# Altium PCB BH67F275&62_TEMP_EVM_V1.2.PcbDoc (part 1 of 2)
Units mil, origin at the board's own origin, x right, y up, seen from the top; angles counter-clockwise.
Board outline 4690.02 x 3082.03 mil, 2 copper layers (Top Layer, Bottom Layer); 69 components, 83 nets, 365 pads, 122 vias.
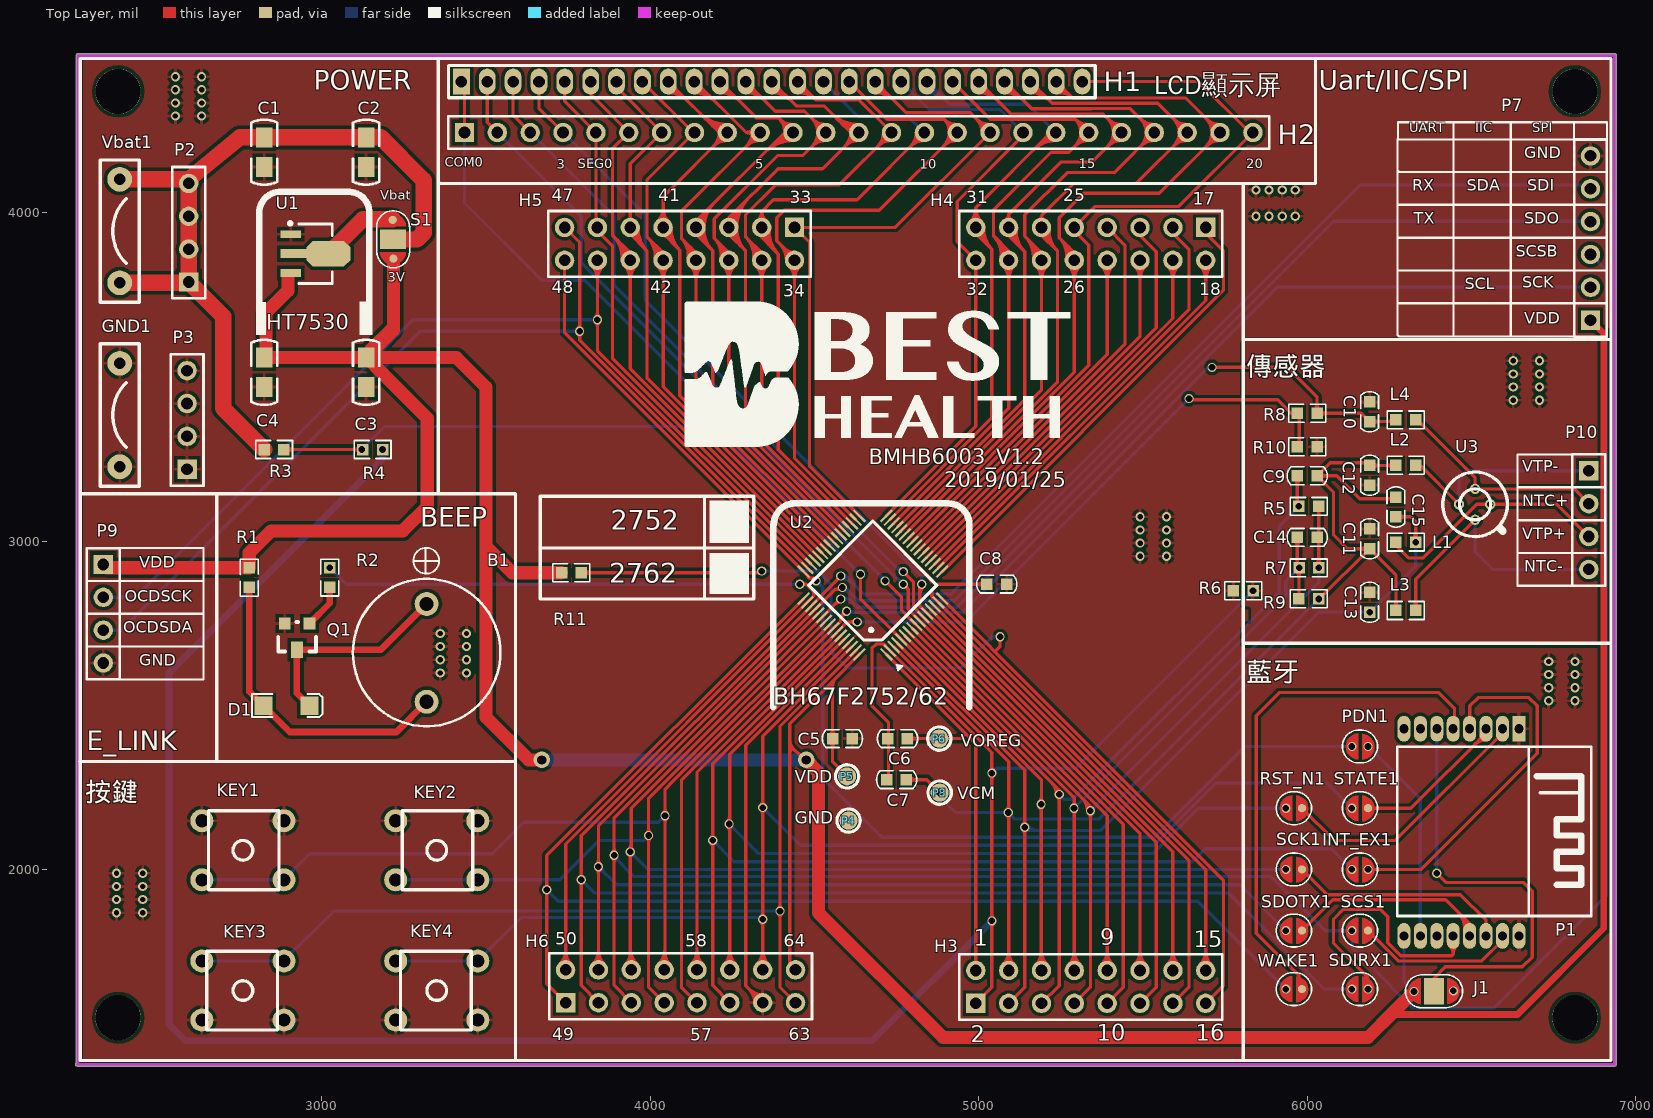
[diagram p0: Top Layer view]
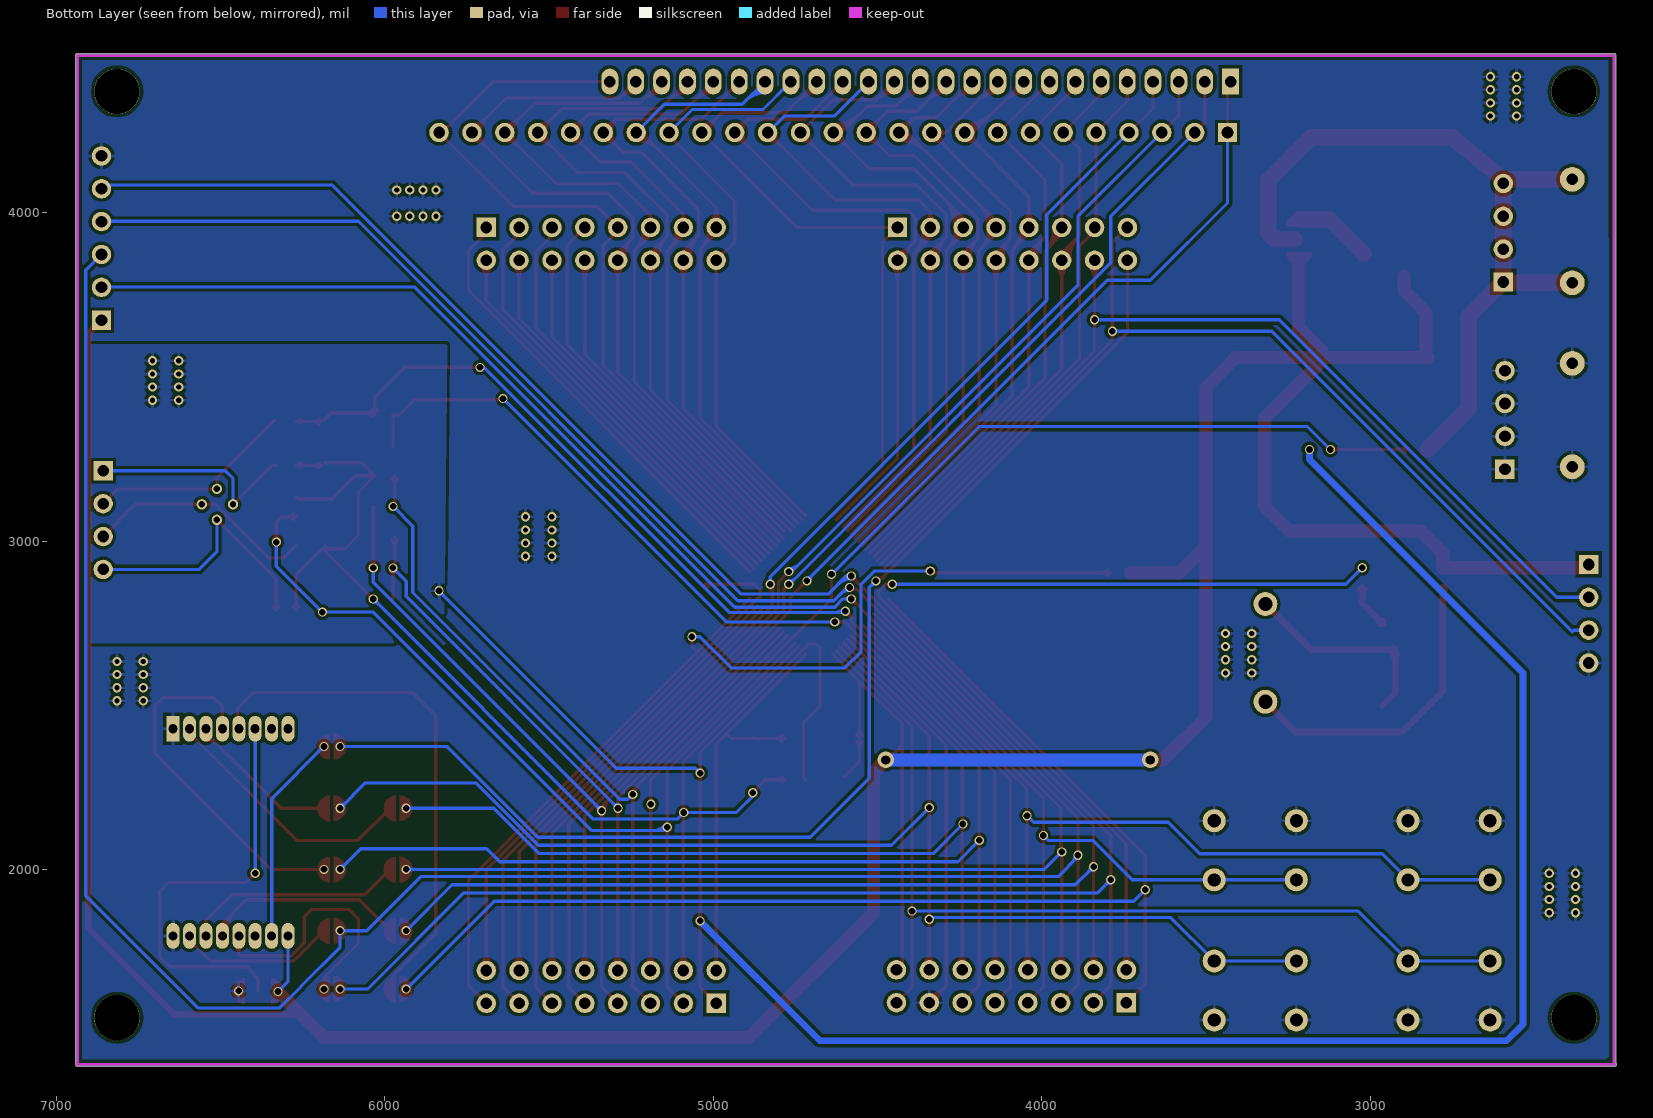
[diagram p1: Bottom Layer view, seen from below]

## Layer stack, top to bottom
Top Layer: signal copper 1.4
Dielectric: dielectric 12.6, FR-4, Dk 4.8
Bottom Layer: signal copper 1.4

## Board outline
2255.92,1402.93 cw(c2255.92,1407.95) 2252.91,1411.96 2252.91,4479.95 cw(c2257.92,4479.95) 2257.92,4484.97 6935.92,4484.97 cw(c6935.92,4479.95) 6940.94,4479.95 6940.94,1407.95 cw(c6935.92,1407.95) 6935.92,1402.93

## Design rules (kind name [scope] priority, off if disabled: settings)
Clearance Clearance_1 [InPolygon] p1: gap=10
Clearance [All] p2: gap=6
MinimumSolderMaskSliver [All] p1: minsoldermaskwidth=0
NetAntennae [All] p1: netantennaetolerance=1
PolygonConnect [All] p1: connectstyle=Relief reliefconductorwidth=10 reliefentries=4 polygonreliefangle="90 Angle"
RoutingVias [All] p1: holewidth=28 width=50 viastyle="Through Hole" minholewidth=10 minwidth=10 maxholewidth=28 maxwidth=50
SilkToSilkClearance [All] p1: silktosilkclearance=0
SilkscreenOverComponentPads SilkToSolderMaskClearance [IsPad] p1: minsilkscreentomaskgap=-1
SolderMaskExpansion [All] p1: expansion=4
Width [All] p1: maxlimit=50 minlimit=10 preferedwidth=10
24 further rules are at their usual default settings.

## Components (designator, comment, footprint, x,y, rotation, side; value= is the part's Value field where it differs from the comment)
B1 "Beep" BEEP_12MM 3319.29,2810 r270 top
C1 "CAPACITOR" C0805 2825,4140 r90 top
C2 "ECAP" C0805 3135,4230 r270 top
C3 "ECAP" C0805 3135,3560.1 r270 top
C4 "CAPACITOR" C0805 2825,3470 r90 top
C5 "106" CAP_0603 4585,2400 r180 top
C6 "106" CAP_0603 4752.71,2400 r180 top
C7 "105" CAP_0603 4750,2275 r0 top
C8 "104" CAP_0603 5055,2870 r0 top
C9 "104" CAP_0603 6000,3200 r180 top
C10 "104" CAP_0603 6190,3395 r90 top
C11 "104" CAP_0603 6190,3008.24 r90 top
C12 "104" CAP_0603 6190,3201.62 r270 top
C13 "104" CAP_0603 6190,2814.86 r90 top
C14 "104" CAP_0603 6000,3012.73 r180 top
C15 "104" CAP_0603 6270,3105 r270 top
D1 "SS14" DIODE 2962.5,2500 r180 top
GND1 "CONNET*2" "CLIP POWER PIN" 2385,3385 r90 top
H1 "HEADER36" "Header25(2mm) - duplicate" 3425,4400 r0 top
H2 "HEADER36" Header252.54mm) 3434.57,4245 r0 top
H3 "HEADER8*2" HEAD2X8 5780,1600 r180 top
H4 "HEADER8*2" 2HEAD2X8 6307,4130 r180 top
H5 "HEADER8*2" 3HEAD2X8 4650.2,3995 r180 top
H6 "HEADER8*2" "4HEAD2X8 - DUPLICATE" 6481.38,1607 r180 top
INT_EX1 "JUMPER" JUMP_2 6167.05,2000.75 r0 top
J1 "Header 3" JUMP_3 6435,1550 r180 top
KEY1 "SW-PB" AN66 2760,2060 r90 top
KEY2 "SW-PB" AN66 3350,2060 r90 top
KEY3 "SW-PB" AN66 2760,1633 r270 top
KEY4 "SW-PB" AN66 3350,1633 r270 top
L1 "BEAD" RES_0603 6300,2998.24 r180 top
L2 "BEAD" RES_0603 6300,3231.62 r0 top
L3 "BEAD" RES_0603 6300,2790 r0 top
L4 "BEAD" RES_0603 6300,3370 r0 top
P1 "Header 8X2A" BC7602 6570,2115 r270 top
P2 "Header 4" HDR1X4 2595,3790 r90 top
P3 "Header 4" HDR1X4 2590,3220 r90 top
P4 "PAD" PAD 4485,2200 r0 top
P5 "PAD" PAD 4480.62,2334.49 r0 top
P6 "PAD" PAD 4761.34,2449.49 r0 top
P7 "Header 6H" HEAD1X6 6830,3685 r90 top
P8 "PAD" PAD 4762.48,2285 r0 top
P9 "Header 4" HDR1X4 2335,2930 r270 top
P10 "IRSensor Pin" HDR1X4 6857.36,3215 r270 top
PDN1 "JUMPER" JUMP_2 6167.05,2374.96 r0 top
Q1 "8050" SOT-23 2925,2710 r180 top
R1 "20R" RES_0603 2779.29,2890 r270 top
R2 "1K" RES_0603 3024.29,2890 r90 top
R3 "RES0603" RES_0603 2855,3280 r180 top
R4 "RES0603" RES_0603 3155,3280 r180 top
R5 "RES0603" RES_0603 6004.75,3106.72 r0 top
R6 "RES0603" RES_0603 5805,2850 r0 top
R7 "RES0603" RES_0603 6005.18,2919.45 r180 top
R8 "RES0603" RES_0603 6000,3390 r0 top
R9 "RES0603" RES_0603 6004.75,2825.81 r0 top
R10 "RES0603" RES_0603 6000,3288.54 r180 top
R11 "RES0603" RES_0603 3760,2905 r180 top
RST_N1 "JUMPER" JUMP_2 5965.97,2187.17 r0 top
S1 "SW-3" JUMP_3 3298.01,3969 r270 top
SCK1 "JUMPER" JUMP_2 5965.97,2000.75 r0 top
SCS1 "JUMPER" JUMP_2 6167.05,1814.33 r0 top
SDIRX1 "JUMPER" JUMP_2 6167.05,1636.41 r0 top
SDOTX1 "JUMPER" JUMP_2 5965.97,1814.33 r0 top
STATE1 "JUMPER" JUMP_2 6167.05,2187.17 r0 top
U1 "HT7530" SOT89M 2980.63,3876 r0 top
U2 "BH67F2752" 64PIN(LQFP) 4715,2660 r135 top
U3 "IRSensor" TS318_115 6555,3115 r180 top
Vbat1 "CONNET*2" "CLIP POWER PIN" 2385,3945 r90 top
WAKE1 "JUMPER" JUMP_2 5965.97,1636.41 r0 top

## Footprints (in the part's own frame and the unit in brackets; to place one, negate y for a bottom-side part, rotate by r counter-clockwise, add the part's x,y. Pads: shape width x height; smd on the part's side, far side on the other; paste and mask are expansions set on the pad)
2HEAD2X8 [mm]
  rect 1.5x1.5 hole 0.9: 1(15.646,4.42)
  round 1.5 hole 0.9: 2(15.646,6.96) 3(18.186,4.42) 4(18.186,6.96) 5(20.726,4.42) 6(20.726,6.96) 7(23.266,4.42) 8(23.266,6.96) 9(25.806,4.42) 10(25.806,6.96) 11(28.346,4.42) 12(28.346,6.96) 13(30.886,4.42) 14(30.886,6.96) 15(33.426,4.42) 16(33.426,6.96)
  silkscreen extent 14.38,3.15 34.7,8.23
3HEAD2X8 [mm]
  rect 1.5x1.5 hole 0.9: 1(5.359,0.991)
  round 1.5 hole 0.9: 2(5.359,3.531) 3(7.899,0.991) 4(7.899,3.531) 5(10.439,0.991) 6(10.439,3.531) 7(12.979,0.991) 8(12.979,3.531) 9(15.519,0.991) 10(15.519,3.531) 11(18.059,0.991) 12(18.059,3.531) 13(20.599,0.991) 14(20.599,3.531) 15(23.139,0.991) 16(23.139,3.531)
  silkscreen extent 4.09,-0.28 24.41,4.8
"4HEAD2X8 - DUPLICATE" [mm]
  rect 1.5x1.5 hole 0.9: 1(69.571,0.279)
  round 1.5 hole 0.9: 2(69.571,-2.261) 3(67.031,0.279) 4(67.031,-2.261) 5(64.491,0.279) 6(64.491,-2.261) 7(61.951,0.279) 8(61.951,-2.261) 9(59.411,0.279) 10(59.411,-2.261) 11(56.871,0.279) 12(56.871,-2.261) 13(54.331,0.279) 14(54.331,-2.261) 15(51.791,0.279) 16(51.791,-2.261)
  silkscreen extent 50.52,-3.53 70.84,1.55
64PIN(LQFP) [mil]
  rect 50x7 smd: 1(-5,0) 2(-5,-16) 3(-5,-32) 4(-5,-48) 5(-5,-64) 6(-5,-80) 7(-5,-96) 8(-5,-112) 9(-5,-128) 10(-5,-144) 11(-5,-160) 12(-5,-176) 13(-5,-192) 14(-5,-208) 15(-5,-224) 16(-5,-240) 33(351,-240) 34(351,-224) 35(351,-208) 36(351,-192) 37(351,-176) 38(351,-160) 39(351,-144) 40(351,-128) 41(351,-112) 42(351,-96) 43(351,-80) 44(351,-64) 45(351,-48) 46(351,-32) 47(351,-16) 48(351,0)
  rect 7x50 smd: 17(53,-298) 18(69,-298) 19(85,-298) 20(101,-298) 21(117,-298) 22(133,-298) 23(149,-298) 24(165,-298) 25(181,-298) 26(197,-298) 27(213,-298) 28(229,-298) 29(245,-298) 30(261,-298) 31(277,-298) 32(293,-298) 49(293,58) 50(277,58) 51(261,58) 52(245,58) 53(229,58) 54(213,58) 55(197,58) 56(181,58) 57(165,58) 58(149,58) 59(133,58) 60(117,58) 61(101,58) 62(85,58) 63(69,58) 64(53,58)
  silkscreen extent -65,-258 311,18
AN66 [mil] "DIP PUSH BOTTON (6MM*6MM)"
  round 70 hole 40: 1(-90,125) 1(-90,-125) 2(90,125) 2(90,-125)
  silkscreen extent -120,-110 120,105
BC7602 [mm]
  rect 2x1 hole 0.7: 1(-8,1.89)
  oval 2x1 hole 0.7: 2(-8,0.62) 3(-8,-0.65) 4(-8,-1.92) 5(-8,-3.19) 6(-8,-4.46) 7(-8,-5.73) 8(-8,-7) 9(8.016,-7) 10(8.016,-5.73) 11(8.016,-4.46) 12(8.016,-3.19) 13(8.016,-1.92) 14(8.016,-0.65) 15(8.016,0.62) 16(8.016,1.89)
  silkscreen extent -6.6,-7.51 6.48,7.48
BEEP_12MM [mm]
  round 1.85 hole 1.1: 1(0,0) 2(7.569,0)
  silkscreen extent -4.34,-5.7 9.46,5.7
C0805 [mil] "0805 CAPCITOR"
  rect 60x50 smd: 1(0,0) 2(90,0)
  silkscreen extent -54,-40 144,40, body extent 6,-25 84,24, height 31
CAP_0603 [mil]
  rect 35x35 smd: 1(-30,0) 2(30,0)
  silkscreen extent -61,-27 61,27
"CLIP POWER PIN" [mm] "USE PAPER CLIP AS POWER PIN(PITCH=8MM)"
  round 1.924 hole 0.9: 1(-4,0) 2(4,0)
  silkscreen extent -5.5,-1.5 5.5,1.5
DIODE [mm]
  rect 1.4x1.4 smd: 1(0,0) 2(3.556,0)
  silkscreen extent -1.02,-0.89 4.44,0.89
HDR1X4 [mm] "Connector; Header; 4 Position"
  rect 1.5x1.5 hole 0.9: 1(0,0)
  round 1.5 hole 0.9: 2(2.54,0) 3(5.08,0) 4(7.62,0)
  silkscreen extent -1.27,-1.27 8.89,1.27
HEAD1X6 [mm]
  rect 1.5x1.5 hole 0.9: 1(-0.287,-0.822)
  round 1.5 hole 0.9: 2(2.253,-0.822) 3(4.793,-0.822) 4(7.333,-0.822) 5(9.873,-0.822) 6(12.413,-0.822)
  silkscreen extent -1.56,-2.09 13.68,0.45
HEAD2X8 [mm]
  round 1.5 hole 0.9: 1(20.041,-2.388) 3(17.501,-2.388) 4(17.501,0.152) 5(14.961,-2.388) 6(14.961,0.152) 7(12.421,-2.388) 8(12.421,0.152) 9(9.881,-2.388) 10(9.881,0.152) 11(7.341,-2.388) 12(7.341,0.152) 13(4.801,-2.388) 14(4.801,0.152) 15(2.261,-2.388) 16(2.261,0.152)
  rect 1.5x1.5 hole 0.9: 2(20.041,0.152)
  silkscreen extent 0.99,-3.66 21.31,1.42
"Header25(2mm) - duplicate" [mm]
  rect 1.3x2 hole 0.9: 1(0,0)
  oval 1.3x2 hole 0.9: 2(2,0) 3(4,0) 4(6,0) 5(8,0) 6(10,0) 7(12,0) 8(14,0) 9(16,0) 10(18,0) 11(20,0) 12(22,0) 13(24,0) 14(26,0) 15(28,0) 16(30,0) 17(32,0) 18(34,0) 19(36,0) 20(38,0) 21(40,0) 22(42,0) 23(44,0) 24(46,0) 25(48,0)
  silkscreen extent -1,-1.25 49.02,1.25
Header252.54mm) [mm]
  rect 1.5x1.5 hole 0.9: 1(0,0)
  round 1.5 hole 0.9: 2(2.54,0) 3(5.08,0) 4(7.62,0) 5(10.16,0) 6(12.7,0) 7(15.24,0) 8(17.78,0) 9(20.32,0) 10(22.86,0) 11(25.4,0) 12(27.94,0) 13(30.48,0) 14(33.02,0) 15(35.56,0) 16(38.1,0) 17(40.64,0) 18(43.18,0) 19(45.72,0) 20(48.26,0) 21(50.8,0) 22(53.34,0) 23(55.88,0) 24(58.42,0) 25(60.96,0)
  silkscreen extent -1.27,-1.27 62.23,1.27
JUMP_2 [mil]
  round 25 smd: 1(-31,1) 2(18,1)
  oval 95x88 on Top Paste: 2(-6,1)
  oval 95x88 on Top Solder: 2(-6,1)
  Top Layer region: -20.31,-37.48 -29.92,-33.5 -38.17,-27.17 -44.5,-18.92 -48.48,-9.31 -49.84,1 -48.48,11.31 -44.5,20.92 -38.17,29.17 -29.92,35.5 -20.31,39.48 -12.16,40.56 -12.16,-38.56
  Top Layer region: 8.15,38.48 17.76,34.5 26.01,28.17 32.34,19.92 36.32,10.31 37.68,0 36.32,-10.31 32.34,-19.92 26.01,-28.17 17.76,-34.5 8.15,-38.48 0,-39.56 0,39.56
  silkscreen extent -60,-49 47,51
JUMP_3 [mil]
  round 25 smd: 1(-10,-82) 3(108,-80)
  rect 60x80 smd: 2(49,-81)
  oval 162x88 on Top Paste: 2(49,-81)
  oval 162x88 on Top Solder: 2(49,-81)
  Top Layer region: 97.15,-43.02 106.76,-47 115.01,-53.33 121.34,-61.58 125.32,-71.19 126.68,-81.5 125.32,-91.81 121.34,-101.42 115.01,-109.67 106.76,-116 97.15,-119.98 89,-121.06 89,-41.94
  Top Layer region: 0.69,-119.98 -8.92,-116 -17.17,-109.67 -23.5,-101.42 -27.48,-91.81 -28.84,-81.5 -27.48,-71.19 -23.5,-61.58 -17.17,-53.33 -8.92,-47 0.69,-43.02 8.84,-41.94 8.84,-121.06
  silkscreen extent -38,-131 136,-30
PAD [mm]
  round 1.4 smd: 1(3.014,-1.257)
  silkscreen extent 2.12,-2.16 3.91,-0.36
RES_0603 [mil]
  rect 35x35 smd: 1(30,0) 2(-30,0)
  silkscreen extent -56,-27 56,27
SOT89M [mm] "SOT89, 3-Leads, Body 4.5x2.4 mm, Pitch 1.5mm, Lead Span 4.1mm, IPC Low Density"
  rect 1.6x0.6 smd: 1(-1.9,1.5) 3(-1.9,-1.5)
  rect 2x0.7 smd: 2(-1.7,0)
  oct 3.4x2 smd: 2(1,0)
  silkscreen extent -2.07,-2.3 1.3,2.47, body extent -2.39,-2.25 1.91,2.25, height 1.51
SOT-23 [mil]
  rect 36x36 smd: 1(-37.5,-40) 2(37.5,-40)
  rect 36x50 smd: 3(0.5,40)
  silkscreen extent -58,-45 58,45
TS318_115 [mm]
  round 0.8 hole 0.5: 1(-0.051,0.051) 2(1.118,-1.143) 3(2.362,0.051) 4(1.118,1.245)
  silkscreen extent -1.38,-2.45 3.61,2.55

## Part data
C1 C2 C3 C4: "Capacitor"
C5 C6 C7 C8: library part CAP(1)
C9 C10 C11 C12 C13 C14 C15: library part Cap, "Capacitor"
D1: library part DIODE(1)
GND1 Vbat1: "2CONNET*2.54"
INT_EX1 PDN1 RST_N1 SCK1 SCS1 SDIRX1 SDOTX1 STATE1 WAKE1: library part JUMPER2, "JUMPER FOR BREAK CIRCUTS"
J1: "Header, 3-Pin"
KEY1 KEY2 KEY3 KEY4: "Switch"
L1 L2 L3 L4 R1 R2: library part RES(1)
P1: "Header, 8-Pin, Dual row"
P2 P3 P9: "Header, 4-Pin"
P7: "Header, 6-Pin, Right Angle"
P10: library part "Header 4", "Header, 4-Pin"
Q1: library part NPN(1)
R3 R4 R5 R6 R7 R8 R9 R10 R11: library part Res2, "Resistor"
U1: library part LDO, "Low Drop Regulator"

## Free pads (board coordinates)
  round 137.8 hole 137.8: 5(2380,1550) 5(2380,4370) 5(6815,1550) 5(6815,4370)

## Via types
v1: diameter 28, hole 20, Top Layer to Bottom Layer, tented both sides, 64 vias
v2: diameter 28, hole 16, Top Layer to Bottom Layer, tented both sides, 56 vias
v3: diameter 50, hole 28, Top Layer to Bottom Layer, 2 vias

## Nets (pads, with @x,y where several pads share a name; then routed paths per layer and width w, separated by ;. In a path a pad name is that pad's centre, name@x,y a point inside that pad or via, vN(x,y) a via of type N, cw(c..) or ccw(c..) an arc to the next point about the centre after c; other vN are vias at no path point)
2INT_EXT: INT_EX1.2@6185.05,2001.75 P1.4 | length 1164.8
  Top Layer w10: v1(6185.05,2001.75) 6346.75,2001.75 6700,2355 6700,2500 6675,2525 6520,2525 6494.41,2499.41 P1.4@6494.41,2429.96 ; INT_EX1.2@6190.35,1996.45 cw(c6203.16,1983.64) 6203.16,2001.75 cw(c6203.16,2019.86) INT_EX1.2@6190.35,2007.05 ; INT_EX1.2@6191.41,1995.39 cw(c6206.78,1980.02) 6206.78,2001.75 cw(c6206.78,2023.48) INT_EX1.2@6191.41,2008.12
2PDN: P1.10 PDN1.2@6185.05,2375.96 | length 642.6
  Bottom Layer w10: v1(6185.05,2375.96) 6344.41,2216.6 P1.10@6344.41,1799.41
2RST_N: P1.2 RST_N1.2@5983.97,2188.17 | length 828
  Top Layer w10: RST_N1.2@5983.97,2180.67 cw(c5983.97,2162.56) 5996.78,2175.37 cw(c6009.58,2188.17) RST_N1.2@5991.47,2188.17 ; RST_N1.2@5983.97,2188.17 6082.15,2090 6267.53,2090 6594.41,2416.88 P1.2@6594.41,2429.96
2SCK: P1.14 SCK1.2@5983.97,2001.75 | length 700.3
  Top Layer w10: SCK1.2@5983.97,1994.25 cw(c5983.97,1976.14) 5996.78,1988.95 cw(c6009.58,2001.75) SCK1.2@5991.47,2001.75 ; SCK1.2@5983.97,2001.75 6060.73,1925 6466,1925 6544.41,1846.59 P1.14@6544.41,1799.41
2SCSB: P1.15 SCS1.2@6185.05,1815.33 | length 515.4
  Top Layer w10: SCS1.2@6185.05,1807.83 cw(c6185.05,1789.73) 6197.85,1802.53 cw(c6210.66,1815.33) SCS1.2@6192.55,1815.33 ; SCS1.2@6185.05,1815.33 6277.38,1723 6531.08,1723 6594.41,1786.33 P1.15@6594.41,1799.41
"2SD0 TX": P1.13 SDOTX1.2@5983.97,1815.33 | length 743.5
  Top Layer w10: SDOTX1.2@5983.97,1815.33 6077.64,1909 6421,1909 6494.41,1835.59 P1.13@6494.41,1799.41 ; SDOTX1.2@5983.97,1822.83 ccw(c5983.97,1840.94) 5996.78,1828.14 ccw(c6009.58,1815.33) SDOTX1.2@5991.47,1815.33 ; 6457.68,1872.32 cw(c6404.45,1819.09) P1.13@6479.72,1819.09 ; 6474.75,1855.25 cw(c6438.59,1819.09) P1.13@6489.72,1819.09
"2SDI RX": P1.12 SDIRX1.2@6185.05,1637.41 | length 914.2
  Top Layer w10: SDIRX1.2@6178.68,1643.77 ccw(c6163.32,1659.14) 6185.05,1659.14 ccw(c6206.78,1659.14) SDIRX1.2@6191.41,1643.77 ; SDIRX1.2@6179.75,1642.71 ccw(c6166.94,1655.52) 6185.05,1655.52 ccw(c6203.16,1655.52) SDIRX1.2@6190.35,1642.71 ; v1(6185.05,1637.41) 6185.05,1671.24 6080,1776.29 6080,1850 6110,1880 6222.82,1880 6245,1857.82 6245,1778.01 6284.01,1739 6440,1739 6444.41,1743.41 P1.12@6444.41,1799.41 ; P1.12@6434.03,1769.34 cw(c6408.96,1744.27) 6444.41,1744.27 cw(c6479.86,1744.27) P1.12@6454.79,1769.34
2SPI-UP_N: J1.2@6386,1631 P1.6 | length 1318.8
  Top Layer w10: J1.2@6386,1631 6386,1671 6420,1705 6655,1705 6685,1735 6685,1935 6657.8,1962.2 6422.21,1962.2 v1(6394.41,1990)
  Bottom Layer w10: v1(6394.41,1990) P1.6@6394.41,2429.96
2STATE: P1.3 STATE1.2@6185.05,2188.17 | length 572.7
  Top Layer w10: STATE1.2@6185.05,2188.17 6315.7,2188.17 6544.41,2416.88 P1.3@6544.41,2429.96 ; STATE1.2@6190.35,2182.87 cw(c6203.16,2170.06) 6203.16,2188.17 cw(c6203.16,2206.28) STATE1.2@6190.35,2193.47 ; 6508.07,2380.54 cw(c6544.41,2344.19) P1.3@6544.41,2395.59 ; 6524.01,2396.48 ccw(c6510.22,2410.28) P1.3@6529.72,2410.28 ; 6525.14,2397.61 cw(c6544.41,2378.33) P1.3@6544.41,2405.59
2WAKEUP: P1.5 WAKE1.2@5983.97,1637.41 | length 1679.6
  Top Layer w10: 5975,1653.04 ccw(c5999.61,1653.04) WAKE1.2@5982.21,1635.64 ; 5975,1677.18 ccw(c6023.75,1677.18) WAKE1.2@5989.28,1642.71 ; WAKE1.2@5976.77,1639.5 ccw(c5970.06,1641.44) 5975,1646.39 ; WAKE1.2@5981.89,1644.61 cw(c5979.94,1651.33) 5975,1646.39 ; WAKE1.2@5983.97,1637.41 5975,1646.39 ; P1.5@6440.78,2429.96 6448.05,2437.22 6448.05,2491.95 6400,2540 5915,2540 5845,2470 5845,1807.78 5975,1677.78 5975,1646.39
AN0: C13.1 C15.2 H3.4 L1.2 U2.4 | length 3268.3
  Top Layer w10: U2.4@4752.48,2690.41 5140,2302.88 v1(5140,2130) 5140,1643 H3.4@5091,1594 ; v1@5133.64,2123.64 cw(c5118.27,2108.27) 5140,2108.27 cw(c5161.73,2108.27) v1@5146.36,2123.64 ; v1@5133.64,2136.36 ccw(c5118.27,2151.73) 5140,2151.73 ccw(c5161.73,2151.73) v1@5146.36,2136.36 ; C13.1@6190,2784.86 C13.1@6190.07,2784.93 ; C15.2@6270,3075 6315,3075 6330,3060 v1(6330,2998.24) L1.2@6330,2988.24 ; C15.2@6278.84,3066.16 cw(c6300.18,3044.82) 6300.18,3075 cw(c6300.18,3105.18) C15.2@6278.84,3083.84 ; L1.2@6321.16,3007.08 ccw(c6299.82,3028.42) 6330,3028.42 ccw(c6360.18,3028.42) L1.2@6338.84,3007.08 ; L1.2@6323.64,3004.6 ccw(c6308.27,3019.97) 6330,3019.97 ccw(c6351.73,3019.97) L1.2@6336.36,3004.6 ; C13.1@6190.07,2784.93 v1(6190,2785) 6190.14,2785 C13.1@6190.07,2784.93
  Bottom Layer w10: v1@5139.29,2129.29 ccw(c5161.73,2151.73) 5161.73,2120 ; v1@5146.36,2136.36 ccw(c5185.87,2175.87) 5185.87,2120 ; 5150,2120 5370,2120 6035,2785 v1(6190,2785) 6330,2925 v1(6330,2998.24)
AN1: H3.5 R3.2 R4.1 U2.5 | length 3753.9
  Top Layer w10: R3.2@2885,3280 v1(3121.4,3280) R4.1@3125,3280 ; R3.2@2893.84,3271.16 cw(c2915.18,3249.82) 2915.18,3280 cw(c2915.18,3310.18) R3.2@2893.84,3288.84 ; R4.1@3115.03,3273.64 ccw(c3099.67,3258.27) 3099.67,3280 ccw(c3099.67,3301.73) R4.1@3115.03,3286.36 ; R4.1@3116.16,3271.16 ccw(c3094.82,3249.82) 3094.82,3280 ccw(c3094.82,3310.18) R4.1@3116.16,3288.84 ; v1(4640,2900) 4640,2825.51 U2.5@4763.79,2701.72 5191,2274.51 v1@5191,2200 ; H3.5@5173.66,1711.34 ccw(c5134.2,1750.8) 5190,1750.8 ; H3.5@5180.73,1704.27 ccw(c5158.34,1726.66) 5190,1726.66 ; v1@5183.64,2193.64 cw(c5168.27,2178.27) 5190,2178.27 cw(c5211.73,2178.27) v1@5196.36,2193.64 ; v1@5183.64,2206.36 ccw(c5165.86,2224.14) 5191,2224.14 ; 5190,1731.49 ccw(c5228.49,1731.49) H3.5@5201.27,1704.27 ; 5190,1755.63 ccw(c5252.63,1755.63) H3.5@5208.34,1711.34 ; v1(5190,2200) 5190,1695 H3.5@5191,1694 ; 5191,2219.31 ccw(c5209.31,2219.31) v1@5196.36,2206.36
  Bottom Layer w10: v1(3121.4,3280) 3191.4,3350 4190,3350 v1(4640,2900)
AN2: C9.2 H3.6 R5.2 U2.6 | length 2808.3
  Top Layer w10: U2.6@4775.1,2713.03 5245,2243.14 v1(5245,2230) 5245,1648 H3.6@5191,1594 ; 5220.35,2267.79 cw(c5182.56,2230) v1@5236,2230 ; 5237.42,2250.72 cw(c5216.7,2230) v1@5246,2230 ; v1@5238.64,2223.64 cw(c5223.27,2208.27) 5245,2208.27 cw(c5266.73,2208.27) v1@5251.36,2223.64 ; C9.2@5961.16,3191.16 cw(c5939.82,3169.82) 5970,3169.82 cw(c6000.18,3169.82) C9.2@5978.84,3191.16 ; v1(5974.75,3106.72) 5970,3111.47 C9.2@5970,3200 C9.2@5974.75,3195.25
  Bottom Layer w10: v1(5245,2230) 5260,2215 5285.3,2215 5915,2844.7 5915,3046.97 v1(5974.75,3106.72)
AN3: C14.2 H3.7 R7.1 R9.2 U2.7 | length 2823
  Top Layer w10: U2.7@4786.42,2724.35 5291,2219.76 H3.7@5291,1694 ; H3.7@5273.66,1711.34 ccw(c5231.79,1753.21) 5291,1753.21 ccw(c5350.21,1753.21) H3.7@5308.34,1711.34 ; H3.7@5280.73,1704.27 ccw(c5255.93,1729.07) 5291,1729.07 ccw(c5326.07,1729.07) H3.7@5301.27,1704.27 ; v1@5283.64,2181.81 cw(c5265.86,2164.03) 5291,2164.03 ; v1@5283.64,2194.53 ccw(c5265.86,2212.31) 5291,2212.31 ; 5291,2168.86 cw(c5309.31,2168.86) v1@5296.36,2181.81 ; 5291,2207.48 ccw(c5309.31,2207.48) v1@5296.36,2194.53 ; C14.2@5961.16,3003.89 cw(c5939.82,2982.55) 5970,2982.55 cw(c6000.18,2982.55) C14.2@5978.84,3003.89 ; R7.1@5966.35,2910.61 cw(c5945.01,2889.27) 5975.18,2889.27 cw(c6005.36,2889.27) R7.1@5984.02,2910.61 ; R7.1@5968.82,2913.08 cw(c5953.46,2897.72) 5975.18,2897.72 cw(c5996.91,2897.72) R7.1@5981.55,2913.08 ; C14.2@5970,3012.73 5970,2924.63 v1(5975.18,2919.45) 5975.18,2826.25 R9.2@5974.75,2825.81
  Bottom Layer w10: v1(5290,2188.17) 5934.97,2833.15 5934.97,2879.42 v1@5975,2919.45 ; v1@5290,2197.17 ccw(c5290,2218.9) 5305.36,2203.53 ccw(c5320.73,2188.17) v1@5299,2188.17
AN4: H6.10 R8.2 R10.1 U2.58 | length 3192.2
  Top Layer w10: H6.10@4125.03,1713.34 ccw(c4083.16,1755.21) 4142.38,1755.21 ccw(c4201.59,1755.21) H6.10@4159.72,1713.34 ; H6.10@4132.1,1706.27 ccw(c4107.3,1731.07) 4142.38,1731.07 ccw(c4177.45,1731.07) H6.10@4152.65,1706.27 ; H6.10@4142.38,1696 4142.38,2298.09 U2.58@4568.63,2724.35 ; U2.58@4573.32,2729.03 4599.28,2755 v1(4630,2755) ; v1@4623.64,2748.64 ccw(c4608.27,2733.27) 4608.27,2755 ccw(c4608.27,2776.73) v1@4623.64,2761.36 ; v1@5643.52,3431.48 5910,3431.48 5956.48,3385 R8.2@5970,3385 ; R10.1@5975.37,3288.91 R8.2@5975.37,3384.63
  Bottom Layer w10: H6.10@4139.2,1699.17 H6.10@4142.38,1696 ; v1(4630,2755) 4960,2755 v1(5640,3435)
AN5: C10.1 H6.9 L4.2 R8.1 U2.57 | length 3745.9
  Top Layer w10: H6.9@4142.38,1596 4095,1643.37 4095,2273.34 U2.57@4557.32,2735.66 4579.38,2757.72 4579.38,2769.6 v1(4597.62,2787.85) ; v1@4588.62,2787.85 cw(c4566.9,2787.85) 4582.26,2772.49 cw(c4597.62,2757.12) v1@4597.62,2778.85 ; v1(5710,3530) 5939.75,3530 6030,3439.75 R8.1@6030,3390 R8.1@6030,3385 ; R8.1@6021.16,3398.84 ccw(c5999.82,3420.18) 6030,3420.18 ccw(c6060.18,3420.18) 6038.84,3398.84 ccw(c6060.18,3420.18) 6060.18,3390 ccw(c6060.18,3359.82) R8.1@6038.84,3381.16 ; R8.1@6035,3390 6165,3390 C10.1@6190,3365 6247.5,3365 ; C10.1@6198.84,3356.16 cw(c6220.18,3334.82) 6220.18,3365 cw(c6220.18,3395.18) C10.1@6198.84,3373.84 ; L4.2@6270,3365 6247.5,3365 ; 6247.5,3365 ccw(c6247.5,3375.71) 6257.88,3373.08 cw(c6247.5,3375.71) 6247.5,3365 ; 6251.89,3365 cw(c6251.89,3351.89) 6261.16,3361.16 ccw(c6251.89,3351.89) 6251.89,3365
  Bottom Layer w10: v1(4597.62,2787.85) 4601.48,2784 4951.57,2784 v1@5701.46,3533.89 ; v1@4603.99,2794.21 ccw(c4628.65,2818.87) 4628.65,2784
AN6: H6.8 KEY1.1 U2.56 | length 2946.2
  Top Layer w10: H6.8@4025.03,1713.34 ccw(c3976.83,1761.55) 4045,1761.55 ; H6.8@4032.1,1706.27 ccw(c4000.97,1737.4) 4045,1737.4 ; v1@4038.64,2158.64 cw(c4023.27,2143.27) 4045,2143.27 cw(c4066.73,2143.27) v1@4051.36,2158.64 ; v1@4038.64,2171.36 ccw(c4023.27,2186.73) 4045,2186.73 ccw(c4066.73,2186.73) v1@4051.36,2171.36 ; H6.8@4042.38,1696 4045,1698.62 v1(4045,2165) 4045,2245.97 4069.03,2270 U2.56@4546,2746.97 ; 4045,1748.88 ccw(c4095.26,1748.88) H6.8@4059.72,1713.34
  Bottom Layer w10: KEY1.1@2635,1970 KEY1.1@2885,1970 2964,2049 3519,2049 3615,2145 4025,2145 v1(4045,2165)
AN7: H6.7 KEY2.1 U2.55 | length 2290.5
  Top Layer w10: v1@3988.64,2098.64 cw(c3973.27,2083.27) 3995,2083.27 cw(c4016.73,2083.27) v1@4001.36,2098.64 ; v1@3988.64,2111.36 ccw(c3973.27,2126.73) 3995,2126.73 ccw(c4016.73,2126.73) v1@4001.36,2111.36 ; H6.7@4042.38,1596 3995,1643.37 v1(3995,2105) 3995,2218.6 U2.55@4528.2,2751.8
  Bottom Layer w10: KEY2.1@3225,1970 KEY2.1@3475,1970 3725,1970 3845,2090 3980,2090 v1(3995,2105)
AVSS: C6.2 C7.1 C10.2 C11.2 C12.2 C13.2 H3.2 R4.2 R6.1 R10.2 U2.2 | length 7586
  Top Layer w10: 4707.08,2687.62 cw(c4707.08,2675.41) U2.2@4715.71,2684.04 ; C7.1@4720,2275 4725,2280 4725,2450 4675,2500 4675,2675 4687.62,2687.62 4710.01,2687.62 U2.2@4729.85,2667.78 5022.63,2375 ; H3.2@4991,1594 5040,1643 v1(5040,1845) v1(5040,2295) 5040,2357.63 5022.63,2375 ; 5026.31,2371.31 5022.63,2375 ; v1@5033.64,1838.64 cw(c5018.27,1823.27) 5040,1823.27 cw(c5061.73,1823.27) v1@5046.36,1838.64 ; v1@5033.64,1851.36 ccw(c5018.27,1866.73) 5040,1866.73 ccw(c5061.73,1866.73) v1@5046.36,1851.36 ; v1@5033.64,2288.64 cw(c5018.27,2273.27) 5040,2273.27 cw(c5061.73,2273.27) v1@5046.36,2288.64 ; v1@5033.64,2301.36 ccw(c5018.27,2316.73) 5040,2316.73 ccw(c5061.73,2316.73) v1@5046.36,2301.36
  Bottom Layer w10: v1(5040,2295) 5055,2310 5295,2310 v1(5835,2850)
  Bottom Layer w20: v1(3185,3280) 3185,3250 2535,2600 2535,1530 2585,1480 4675,1480 v1(5040,1845)
  other v2: 6627.42,3430.1 6707.42,3430.1 6627.42,3470.1 6707.42,3470.1 6627.42,3510.1 6707.42,3510.1 6627.42,3550.1 6707.42,3550.1
BEEP: H6.2 R2.1 U2.50 | length 3146
  Top Layer w10: H6.2@3725.03,1713.34 ccw(c3683.16,1755.21) 3742.38,1755.21 ccw(c3801.59,1755.21) H6.2@3759.72,1713.34 ; H6.2@3732.1,1706.27 ccw(c3707.3,1731.07) 3742.38,1731.07 ccw(c3777.45,1731.07) H6.2@3752.65,1706.27 ; H6.2@3742.38,1696 3742.38,2079.11 U2.50@4478.12,2814.86 4497.96,2834.7 4497.96,2847.04 4475,2870 ; v1(4455,2870) 4475,2870 ; v1@4461.74,2864.03 cw(c4475,2852.28) 4475,2870 ; v1@4461.74,2875.97 ccw(c4475,2887.72) 4475,2870
  Bottom Layer w10: v1(3024.29,2920) 3074.29,2870 v1(4455,2870)
COM0: H1.1 H2.1 H3.9 U2.9 | length 3778.7
  Top Layer w10: H1.1@3425,4400 3434.57,4390.43 H2.1@3434.57,4245 ; v1(4715,2880) 4765,2830 4765,2791.02 4804.36,2751.66 U2.9@4809.05,2746.97 5391,2165.02 H3.9@5391,1694 ; H3.9@5373.66,1711.34 ccw(c5331.79,1753.21) 5391,1753.21 ccw(c5450.21,1753.21) H3.9@5408.34,1711.34 ; H3.9@5380.73,1704.27 ccw(c5355.93,1729.07) 5391,1729.07 ccw(c5426.07,1729.07) H3.9@5401.27,1704.27
  Bottom Layer w10: H2.1@3434.57,4245 3434.57,4030.43 3670,3795 3800,3795 v1(4715,2880) ; v1@4706,2880 ccw(c4684.27,2880) 4699.64,2895.36 ccw(c4715,2910.73) v1@4715,2889
COM1: H1.2 H2.2 H3.10 U2.10 | length 3697.8
  Top Layer w10: H1.2@3503.74,4400 3503.74,4275.83 H2.2@3534.57,4245 ; v1@4770,2861 cw(c4770,2839.27) 4785.36,2854.64 cw(c4800.73,2870) v1@4779,2870 ; v1(4770,2870) 4785.67,2854.33 4785.67,2792.97 U2.10@4820.36,2758.29 5440,2138.65 5440,1643 H3.10@5391,1594
  Bottom Layer w10: H2.2@3534.57,4245 3790,3989.57 3790,3847.88 4767.88,2870 v1(4770,2870) ; 4751.02,2886.86 ccw(c4770,2905.84) v1@4770,2879 ; 4756.13,2881.75 cw(c4744.38,2870) v1@4761,2870
COM2: H1.3 H2.3 H3.11 U2.11 | length 3682
  Top Layer w10: H1.3@3582.48,4400 3582.48,4297.09 H2.3@3634.57,4245 ; v1(4770,2908.19) 4801.67,2876.52 4801.67,2799.6 U2.11@4831.67,2769.6 5491,2110.27 H3.11@5491,1694 ; H3.11@5473.66,1711.34 ccw(c5431.79,1753.21) 5491,1753.21 ccw(c5550.21,1753.21) H3.11@5508.34,1711.34 ; H3.11@5480.73,1704.27 ccw(c5455.93,1729.07) 5491,1729.07 ccw(c5526.07,1729.07) H3.11@5501.27,1704.27
  Bottom Layer w10: H2.3@3634.57,4245 3890,3989.57 3890,3780 4761.81,2908.19 v1(4770,2908.19) ; 4740.65,2929.35 ccw(c4770,2958.71) v1@4770,2917.19
COM3: H1.4 H2.4 H3.12 U2.12 | length 3658.8
  Top Layer w10: H1.4@3661.22,4400 3661.22,4318.35 H2.4@3734.57,4245 ; 4820.36,2833.03 cw(c4863.64,2833.03) v1@4833.04,2863.64 ; 4820.36,2857.17 cw(c4839.5,2857.17) v1@4825.97,2870.71 ; v1(4826.67,2870) 4820.36,2863.69 4820.36,2803.54 U2.12@4842.99,2780.92 5540,2083.9 5540,1643 H3.12@5491,1594
  Bottom Layer w10: H2.4@3734.57,4245 3985,3994.57 3985,3735 4826.67,2893.33 v1(4826.67,2870)
GND: C1.1 C2.2 C3.2 C4.1 C5.1 C8.2 GND1.1 GND1.2 H6.13 J1.1 KEY1.2 KEY2.2 KEY3.2 KEY4.2 P1.1 P1.16 P3.1 P3.2 P3.3 P3.4 P4.1 P7.6 P9.4 Q1.2 R6.2 U1.1 U2.61 | length 1395.2
  Top Layer w10: H6.13@4317.85,1596 ccw(c4258.63,1596) 4300.5,1637.87 ccw(c4342.38,1679.74) H6.13@4342.38,1620.52 ; H6.13@4327.85,1596 ccw(c4292.78,1596) 4317.58,1620.8 ccw(c4342.38,1645.6) H6.13@4342.38,1610.52 ; H6.13@4342.38,1596 4291.14,1647.23 4291.14,2378.98 U2.61@4602.57,2690.41
  Top Layer w40: GND1.1@2385,3227.52 GND1.1@2385,3230
  other v1: 6445,1632
  other v2: 2375,1870 2455,1870 2375,1910 2455,1910 2375,1950 2455,1950 2375,1990 2455,1990 6735,2515 6815,2515 6735,2555 6815,2555 6735,2595 6815,2595 3360.7,2600 3440.7,2600 6735,2635 6815,2635 3360.7,2640 3440.7,2640 3360.7,2680 3440.7,2680 3360.7,2720 3440.7,2720 5491.34,2955 5571.34,2955 5491.34,2995 5571.34,2995 5491.34,3035 5571.34,3035 5491.34,3075 5571.34,3075 5843.7,3990 5883.7,3990 5923.7,3990 5963.7,3990 5843.7,4070 5883.7,4070 5923.7,4070 5963.7,4070 2554.37,4295 2634.37,4295 2554.37,4335 2634.37,4335 2554.37,4375 2634.37,4375 2554.37,4415 2634.37,4415
INT_EXT: H6.11 INT_EX1.1 U2.59 | length 3418.4
  Top Layer w10: v1@4183.64,2083.64 cw(c4168.27,2068.27) 4190,2068.27 cw(c4211.73,2068.27) v1@4196.36,2083.64 ; v1@4183.64,2096.36 ccw(c4168.27,2111.73) 4190,2111.73 ccw(c4211.73,2111.73) v1@4196.36,2096.36 ; H6.11@4242.38,1596 4190,1648.37 v1(4190,2090) 4190,2323.09 U2.59@4579.94,2713.03
  Bottom Layer w10: v1(4190,2090) 4255,2025 5650,2025 5690,2065 6072.8,2065 v1(6136.05,2001.75) ; v1@6127.05,2001.75 ccw(c6105.32,2001.75) 6120.68,2017.12 ccw(c6136.05,2032.48) v1@6136.05,2010.75
KEY3: H6.15 KEY3.1 U2.63 | length 3078
  Top Layer w10: v1@4388.64,1868.64 cw(c4373.27,1853.27) 4395,1853.27 cw(c4416.73,1853.27) v1@4401.36,1868.64 ; v1@4388.64,1881.36 ccw(c4373.27,1896.73) 4395,1896.73 ccw(c4416.73,1896.73) v1@4401.36,1881.36 ; H6.15@4442.38,1596 4395,1643.37 v1(4395,1875) 4395,2437.58 U2.63@4625.2,2667.78
  Bottom Layer w10: KEY3.1@2635,1723 KEY3.1@2885,1723 3037,1875 v1(4395,1875)
KEY4: H6.14 KEY4.1 STATE1.1 U2.62 | length 4533.7
  Top Layer w10: H6.14@4325.03,1713.34 ccw(c4283.16,1755.21) 4342.38,1755.21 ccw(c4401.59,1755.21) H6.14@4359.72,1713.34 ; H6.14@4332.1,1706.27 ccw(c4307.3,1731.07) 4342.38,1731.07 ccw(c4377.45,1731.07) H6.14@4352.65,1706.27 ; v1@4336.01,1843.64 cw(c4320.65,1828.27) 4342.38,1828.27 cw(c4364.1,1828.27) v1@4348.74,1843.64 ; v1@4336.01,1856.36 ccw(c4320.65,1871.73) 4342.38,1871.73 ccw(c4364.1,1871.73) v1@4348.74,1856.36 ; v1@4336.01,2183.64 cw(c4320.65,2168.27) 4342.38,2168.27 cw(c4364.1,2168.27) v1@4348.74,2183.64 ; v1@4336.01,2196.36 ccw(c4320.65,2211.73) 4342.38,2211.73 ccw(c4364.1,2211.73) v1@4348.74,2196.36 ; H6.14@4342.38,1696 4342.38,1815.33 ; 4342.38,1818.51 v1(4342.38,1850) ; v1@4342.38,1860 v1(4342.38,2190) 4342.38,2407.58 U2.62@4613.88,2679.09
  Bottom Layer w10: KEY4.1@3225,1723 KEY4.1@3475,1723 3607,1855 4345,1855 4342.38,1852.38 v1(4342.38,1850) ; v1(4342.38,2190) 4457.38,2075 5532.63,2075 5722.63,2265 6059.22,2265 v1(6136.05,2188.17) ; v1@6127.05,2188.17 ccw(c6105.32,2188.17) 6120.68,2203.53 ccw(c6136.05,2218.9) v1@6136.05,2197.17
LNOPO: C14.1 H3.8 R5.1 R7.2 U2.8 | length 2817.2
  Top Layer w10: U2.8@4797.73,2735.66 5340,2193.39 v1(5340,2180) 5340,1643 H3.8@5291,1594 ; 5315.17,2218.23 cw(c5276.94,2180) v1@5331,2180 ; 5332.24,2201.15 cw(c5311.08,2180) v1@5341,2180 ; v1@5333.64,2173.64 cw(c5318.27,2158.27) 5340,2158.27 cw(c5361.73,2158.27) v1@5346.36,2173.64 ; R7.2@6026.35,2928.29 ccw(c6005.01,2949.63) 6035.18,2949.63 ccw(c6065.36,2949.63) R7.2@6044.02,2928.29 ; R7.2@6028.82,2925.81 ccw(c6013.46,2941.18) 6035.18,2941.18 ccw(c6056.91,2941.18) R7.2@6041.55,2925.81 ; R5.1@6034.75,3106.72 6035.18,3106.28 v1(6035.18,2919.45)
  Bottom Layer w10: v1(5340,2180) 6035.18,2875.18 v1(6035.18,2919.45) ; v1@5340,2189 ccw(c5340,2210.73) 5355.36,2195.36 ccw(c5370.73,2180) v1@5349,2180
NetB1_1: B1.1 D1.1 Q1.3 | length 699.2
  Top Layer w20: Q1.3@2918.84,2657.34 cw(c2905.19,2643.69) 2924.5,2643.69 cw(c2943.81,2643.69) Q1.3@2930.16,2657.34 ; Q1.3@2930.16,2664.34 cw(c2943.81,2650.69) 2943.81,2670 cw(c2943.81,2689.31) Q1.3@2930.16,2675.66 ; D1.1@2962.5,2500 2924.5,2538 Q1.3@2924.5,2670 3179.29,2670 B1.1@3319.29,2810
NetB1_2: B1.2 D1.2 R1.1 | length 974.4
  Top Layer w20: R1.1@2773.98,2854.7 cw(c2761.18,2841.89) 2779.29,2841.89 cw(c2797.39,2841.89) R1.1@2784.59,2854.7 ; R1.1@2779.29,2860 2779.29,2543.21 D1.2@2822.5,2500 2902.5,2420 3227.29,2420 B1.2@3319.29,2512
NetQ1_1: Q1.1 R2.2 | length 194.4
  Top Layer w20: Q1.1@2962.5,2750 3024.29,2811.79 R2.2@3024.29,2860 ; Q1.1@2962.5,2758 ccw(c2962.5,2777.31) 2976.16,2763.66 ccw(c2989.81,2750) Q1.1@2970.5,2750 ; R2.2@3018.98,2854.7 cw(c3006.18,2841.89) 3024.29,2841.89 cw(c3042.39,2841.89) R2.2@3029.59,2854.7
NetS1_1: S1.1 U1.2 | length 239.5
  Top Layer w50: U1.2@3020,3876 3125,3981 S1.1@3216.01,3981
NTC+: L4.1 P10.2 U3.2 | length 647.9
  Top Layer w10: L4.1@6335,3370 6511,3194 U3.2@6511,3160 6812.36,3160 P10.2@6857.36,3115
NTC-: L3.1 P10.4 U3.4 | length 864.1
  Top Layer w10: L3.1@6321.16,2798.84 ccw(c6299.82,2820.18) 6330,2820.18 ccw(c6360.18,2820.18) L3.1@6338.84,2798.84 ; L3.1@6330,2790 6330,2885 U3.4@6511,3066
  Bottom Layer w10: U3.4@6511,3066 6511,2969 6565,2915 P10.4@6857.36,2915
OCDSCK: H5.14 P9.2 U2.46 | length 3270.9
  Top Layer w10: H5.14@3821.85,3838.66 cw(c3779.98,3796.79) 3839.2,3796.79 cw(c3898.41,3796.79) H5.14@3856.54,3838.66 ; H5.14@3828.92,3845.73 cw(c3804.12,3820.93) 3839.2,3820.93 cw(c3874.27,3820.93) H5.14@3849.47,3845.73 ; v1@3832.83,3668.64 cw(c3817.47,3653.27) 3839.2,3653.27 cw(c3860.93,3653.27) v1@3845.56,3668.64 ; v1@3832.83,3681.36 ccw(c3817.47,3696.73) 3839.2,3696.73 ccw(c3860.93,3696.73) v1@3845.56,3681.36 ; H5.14@3839.2,3856 3839.2,3581.06 U2.46@4489.43,2930.82
  Bottom Layer w10: P9.2@2325,2830 P9.2@2335,2830 2430,2830 ; 2433.68,2831.32 3277.35,3675 v1(3839.2,3675)
OCDSDA: H5.15 P9.3 U2.47 | length 3239.8
  Top Layer w10: H5.15@3739.2,3956 3785,3910.2 3785,3612.63 U2.47@4478.12,2919.51 ; v1@3778.64,3633.64 cw(c3763.27,3618.27) 3785,3618.27 cw(c3806.73,3618.27) v1@3791.36,3633.64 ; v1@3778.64,3646.36 ccw(c3763.27,3661.73) 3785,3661.73 ccw(c3806.73,3661.73) v1@3791.36,3646.36
  Bottom Layer w10: P9.3@2325,2730 2380,2730 ; 2385,2725 3300,3640 ; 3305,3640 v1(3785,3640)
PB2: H6.12 RST_N1.1 U2.60 | length 3190.2
  Top Layer w10: H6.12@4225.03,1713.34 ccw(c4183.16,1755.21) 4242.38,1755.21 ccw(c4301.59,1755.21) H6.12@4259.72,1713.34 ; H6.12@4232.1,1706.27 ccw(c4207.3,1731.07) 4242.38,1731.07 ccw(c4277.45,1731.07) H6.12@4252.65,1706.27 ; v1@4233.64,2133.64 cw(c4212.54,2112.54) 4242.38,2112.54 ; v1@4233.64,2146.36 ccw(c4212.54,2167.46) 4242.38,2167.46 ; H6.12@4242.38,1696 4242.38,2352.84 U2.60@4591.26,2701.72 ; 4242.38,2124.01 cw(c4255.99,2124.01) v1@4246.36,2133.64 ; 4242.38,2155.99 ccw(c4255.99,2155.99) v1@4246.36,2146.36
  Bottom Layer w10: v1(4240,2140) 4330,2050 5530.25,2050 5668.43,2188.17 v1(5934.97,2188.17) ; v1@5928.61,2181.81 ccw(c5913.25,2166.44) 5913.25,2188.17 ccw(c5913.25,2209.9) v1@5928.61,2194.53
PB6: H6.1 U2.49 WAKE1.1 | length 3953.1
  Top Layer w10: H6.1@3742.38,1596 3685,1653.37 v1(3685,1940) 3685,2044.36 U2.49@4466.81,2826.17
  Bottom Layer w10: v1(3685,1940) 3720,1905 5667.39,1905 v1(5934.97,1637.41)
PB7: H5.16 PDN1.1 U2.48 | length 3773
  Top Layer w10: H5.16@3739.2,3856 3739.2,3635.8 U2.48@4466.81,2908.19 4486.64,2888.36 ; U2.48@4480.62,2892.43 ccw(c4486.64,2894.85) 4486.64,2888.36 ; U2.48@4480.95,2891.93 ccw(c4489.58,2900.56) 4489.58,2888.36 ; v1@4496.01,2879.5 ccw(c4486.64,2878.97) 4486.64,2888.36 ; v1(4505,2880) 4496.64,2888.36 4486.64,2888.36
  Bottom Layer w10: v1@4505,2871 cw(c4505,2849.27) 4520.36,2864.64 cw(c4535.73,2880) v1@4514,2880 ; v1(4505,2880) 4525,2860 4525,2279.84 4704.84,2100 5535,2100 5810.96,2375.96 v1(6136.05,2375.96)
PLCD: C8.1 H3.15 U2.15 | length 1883.9
  Top Layer w10: 4857.09,2837.63 ccw(c4869.3,2837.63) U2.15@4860.66,2829 ; C8.1@5016.16,2861.16 ccw(c4994.82,2839.82) 4994.82,2870 ccw(c4994.82,2900.18) C8.1@5016.16,2878.84 ; C8.1@5025,2870 4875,2870 4857.09,2852.09 4857.09,2834.7 U2.15@4876.93,2814.86 5691,2000.78 H3.15@5691,1694 ; H3.15@5673.66,1711.34 ccw(c5631.79,1753.21) 5691,1753.21 ccw(c5750.21,1753.21) H3.15@5708.34,1711.34 ; H3.15@5680.73,1704.27 ccw(c5655.93,1729.07) 5691,1729.07 ccw(c5726.07,1729.07) H3.15@5701.27,1704.27
SCK: H6.6 P7.2 SCK1.1 U2.54 | length 6420
  Top Layer w10: H6.6@3925.03,1713.34 ccw(c3890.83,1747.54) 3939.2,1747.54 ; v1@3932.83,2048.64 cw(c3917.47,2033.27) 3939.2,2033.27 cw(c3960.93,2033.27) v1@3945.56,2048.64 ; v1@3932.83,2061.36 ccw(c3909.8,2084.4) 3942.38,2084.4 ; 3939.2,1738.74 ccw(c3985.12,1738.74) H6.6@3952.65,1706.27 ; 3939.2,1762.88 ccw(c4009.26,1762.88) H6.6@3959.72,1713.34 ; v1(3939.2,2055) 3939.2,1699.17 H6.6@3942.38,1696 ; v1@3942.38,2055 3942.38,2188.6 U2.54@4523.37,2769.6 4578.77,2825 v1(4580,2825) ; 3942.38,2069.05 ccw(c3953.25,2069.05) v1@3945.56,2061.36 ; 4562.54,2808.77 cw(c4580,2791.31) v1@4580,2816 ; 4565.5,2811.73 ccw(c4552.24,2825) v1@4571,2825
  Bottom Layer w10: v1(3939.2,2055) 3992.45,2001.75 v1(5934.97,2001.75) ; v1(4580,2825) 4605.15,2825 4630.15,2800 4935,2800 5910,3775 6843.66,3775 P7.2@6857.36,3788.7 ; v1@4586.36,2818.64 cw(c4601.73,2803.27) 4601.73,2825 cw(c4601.73,2846.73) v1@4586.36,2831.36 ; v1@5928.61,1995.39 ccw(c5913.25,1980.02) 5913.25,2001.75 ccw(c5913.25,2023.48) v1@5928.61,2008.12 ; P7.2@6862.36,3773.7 P7.2@6872.36,3773.7